# Altium PCB P2_Buttons.PcbDoc
Units mil, origin at the board's own origin, x right, y up, seen from the top; angles counter-clockwise.
Board outline 775 x 600 mil, 2 copper layers (Top Layer, Bottom Layer); 9 components, 9 nets, 29 pads, 4 vias.
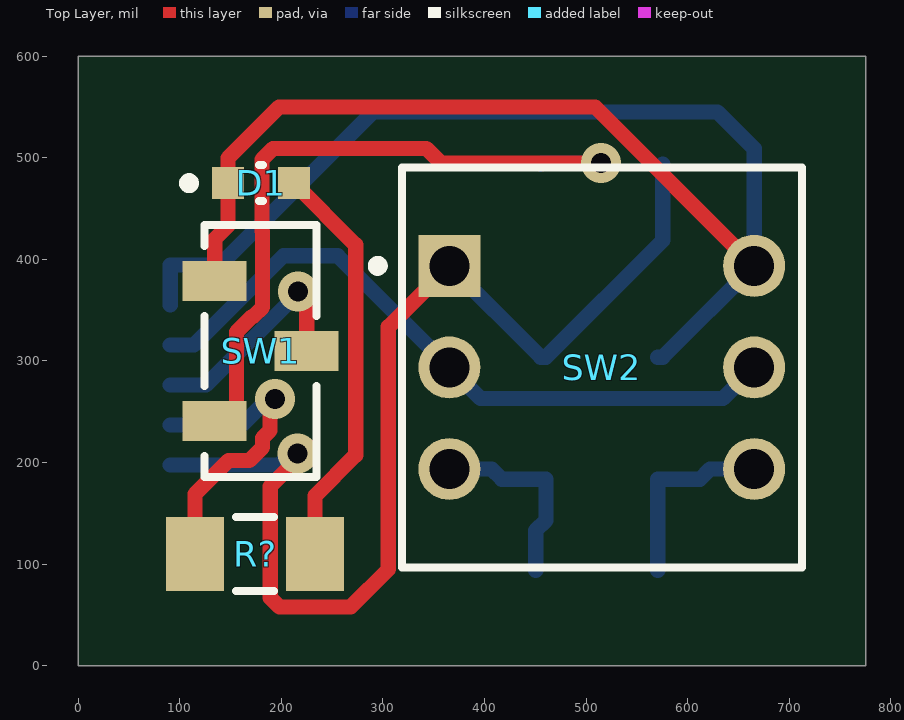
[diagram p0: Top Layer view]
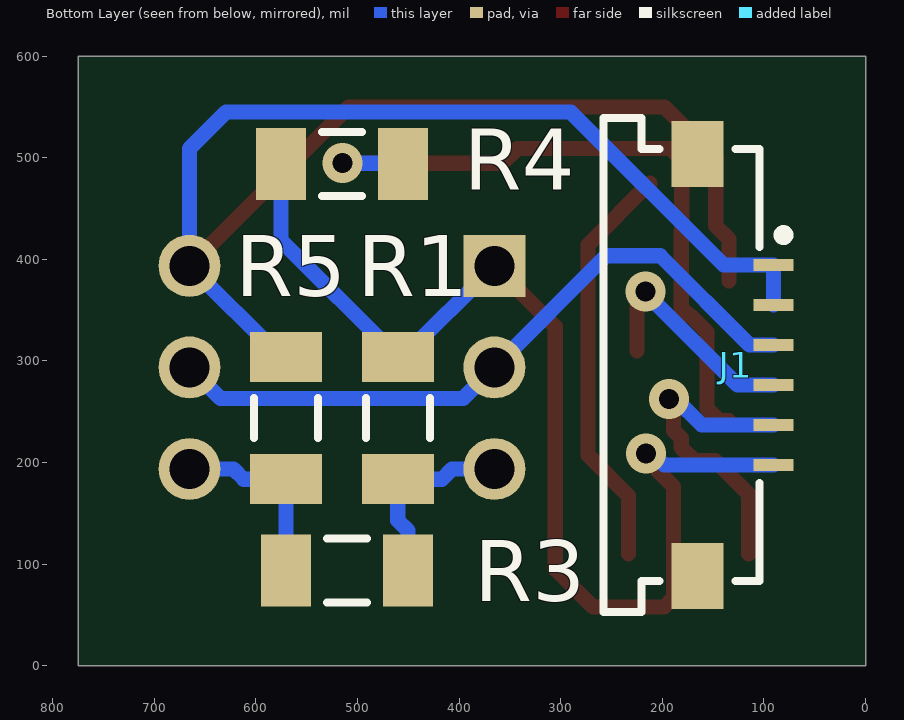
[diagram p1: Bottom Layer view, seen from below]
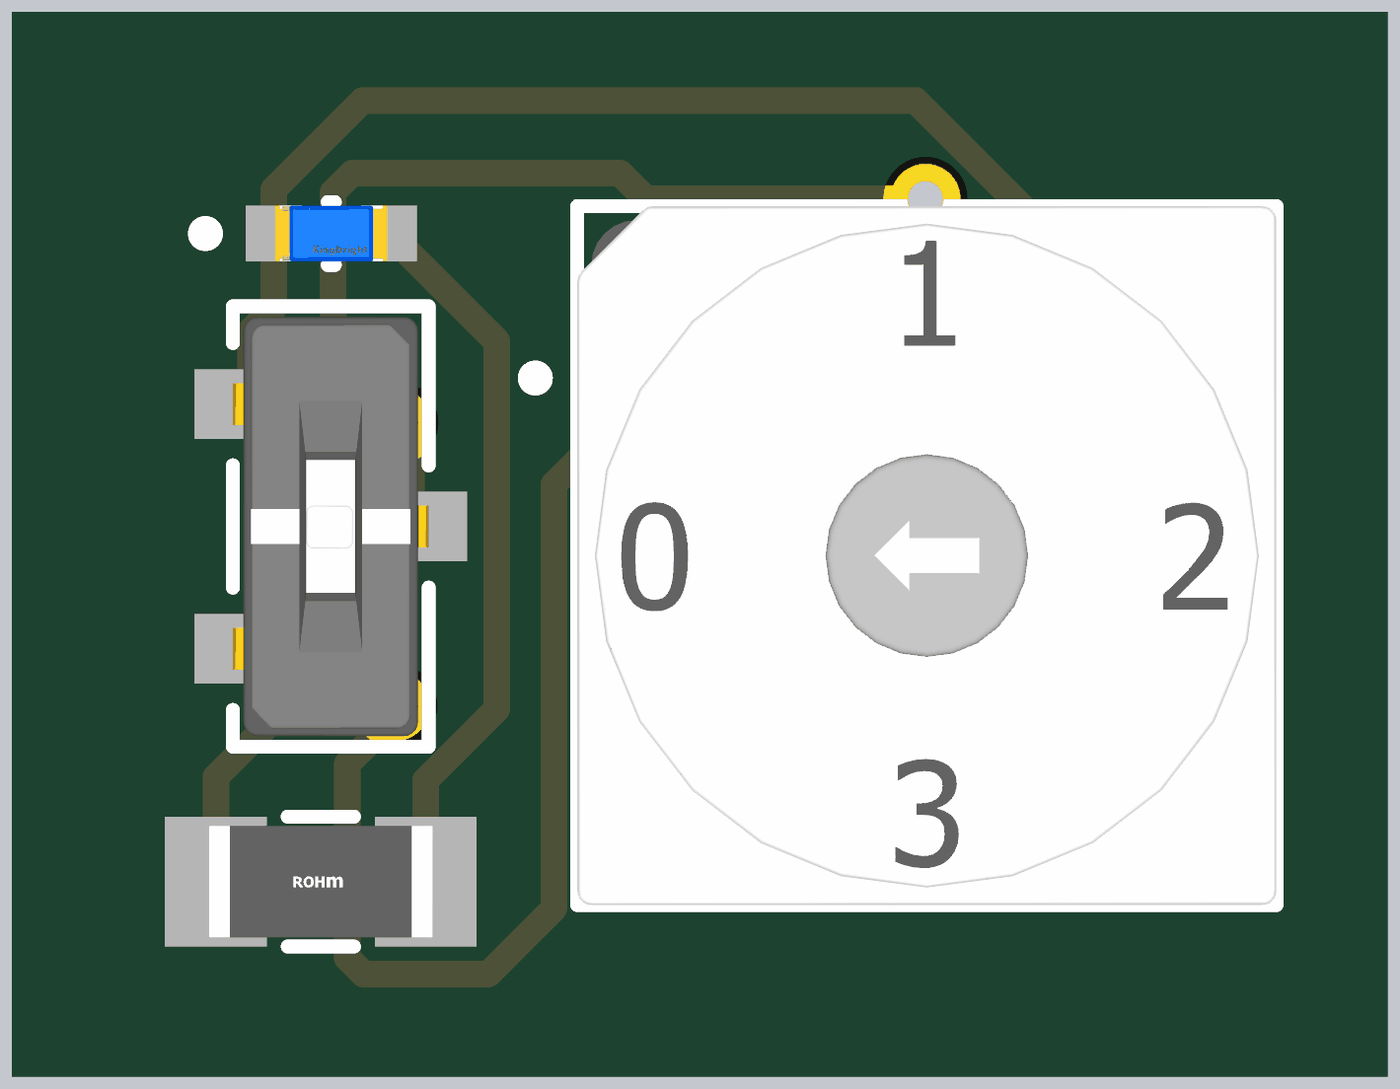
[diagram p2: 3D render of the assembled board from above, using the file's embedded part models]

## Layer stack, top to bottom
Top Solder: solder mask 0.4, Solder Resist, Dk 3.5
Top Layer: signal copper 1.4
Dielectric 1: dielectric 12.6, FR-4, Dk 4.8
Bottom Layer: signal copper 1.4
Bottom Solder: solder mask 0.4, Solder Resist, Dk 3.5

## Board outline
0,0 775,0 775,600 0,600

## Design rules (kind name [scope] priority, off if disabled: settings)
BoardOutlineClearance [All] p1: gap=7.87 ignorepadtopadclearanceinfootprint=FALSE except(15.75: Arc-SplitBarrior Arc-SplitContinuation Track-SplitBarrior Track-SplitContinuation SMDPad-SplitBarrior SMDPad-SplitContinuation THPad-SplitBarrior THPad-SplitContinuation Via-SplitBarrior Via-SplitContinuation Fill-SplitBarrior Fill-SplitContinuation Poly-SplitBarrior Poly-SplitContinuation Region-SplitBarrior Region-SplitContinuation Text-SplitBarrior Text-SplitContinuation)
Clearance "Clearance Bottom Layer" [OnLayer('Bottom Layer')] p1: gap=8 ignorepadtopadclearanceinfootprint=TRUE except(10: Arc-Text Track-Text SMDPad-Text THPad-Text Via-Text Fill-Text Poly-Text Region-Text Text-Text)
Clearance "Clearance Top Layer" [OnLayer('Top Layer')] p2: gap=8 ignorepadtopadclearanceinfootprint=TRUE except(10: Arc-Text Track-Text SMDPad-Text THPad-Text Via-Text Fill-Text Poly-Text Region-Text Text-Text)
Clearance [All] p3: gap=7.87 ignorepadtopadclearanceinfootprint=FALSE except(3.5: Arc-Arc Arc-Track Arc-SMDPad Track-Track Track-SMDPad SMDPad-SMDPad; 5: Arc-Via Track-Via SMDPad-Via THPad-Via Via-Via; 10: Arc-Text Track-Text SMDPad-Text THPad-Text Via-Text Fill-Text Poly-Text Region-Text Text-Text)
HoleSize [All] p1: absolutevalues=TRUE maxlimit=248.03 minlimit=7.87 maxpercent=80.000 minpercent=20.000
MinimumAnnularRing [All] p1: minimumring=3
MinimumSolderMaskSliver [All] p1: minsoldermaskwidth=3.94
PolygonConnect PolygonConnect_1 [All] p1: thpad.connectstyle=Relief thpad.reliefconductorwidth=20 thpad.reliefentries=4 thpad.polygonreliefangle="90 Angle" thpad.airgapwidth=10 smdpad.connectstyle=Relief smdpad.reliefconductorwidth=20 smdpad.reliefentries=4 smdpad.polygonreliefangle="90 Angle" smdpad.airgapwidth=10 via.connectstyle=Direct via.reliefconductorwidth=20 via.reliefentries=4 via.polygonreliefangle="90 Angle" via.airgapwidth=10
RoutingCorners [All] p1: cornerstyle=Round minsetback=100 maxsetback=100
RoutingVias [All] p1: holewidth=19.68 width=39.37 viastyle="Through Hole" minholewidth=7.87 minwidth=17.72 maxholewidth=39.37 maxwidth=78.74
SilkToSilkClearance [All] p1: silktosilkclearance=3.94
SilkToSolderMaskClearance [IsPad] p1: minsilkscreentomaskgap=3.94 clearancetoexposedcopper=TRUE
SolderMaskExpansion [All] p1: expansion=4 istentingtop=FALSE
Width [All] p1: maxlimit=100 minlimit=3.5 preferedwidth=15
25 further rules are at their usual default settings.

## Components (designator, comment, footprint, x,y, rotation, side; value= is the part's Value field where it differs from the comment)
D1 "On Indicator" FP-APT1608QBC-D-MFG 180,475 r0 top
J1 "" 686106183422 181.13,295.94 r270 bottom
R1 "10k" RESC3116X65X40ML10T20 460.38,243.62 r90 bottom
R3 "10k" RESC3116X65X40ML10T20 510.38,93.62 r180 bottom
R4 "10k" RESC3116X65X40ML10T20 515.38,493.62 r0 bottom
R5 "10k" RESC3116X65X40ML10T20 570.38,243.62 r270 bottom
R? "KTR18EZPJ102" FP-KTR18-IPC_A 174.1,110 r0 top
SW1 "" FP-CJS-1201TA-MFG 179.72,310 r270 top
SW2 "Character Select" FP-PT65121-MFG 515.38,293.62 r0 top

## Footprints (in the part's own frame and the unit in brackets; to place one, negate y for a bottom-side part, rotate by r counter-clockwise, add the part's x,y. Pads: shape width x height; smd on the part's side, far side on the other; paste and mask are expansions set on the pad)
686106183422 [mm] "ZIF Connectors, Horizontal, Top Contact Low Profile, pitch 1mm, 6p"
  rect 0.3x1 smd: 1(-2.5,2.3) 2(-1.5,2.3) 3(-0.5,2.3) 4(0.5,2.3) 5(1.5,2.3) 6(2.5,2.3)
  rect 1.65x1.3 smd: M1(-5.275,0.4) M2(5.275,0.4)
  silkscreen extent -6.18,-1.95 6.18,2.67, body extent -6.1,-1.9 6.1,2.35, height 1.28
FP-APT1608QBC-D-MFG [mm]
  rect 0.8x0.8 smd paste+0 mask+0: 1(-0.825,0) 2(0.825,0)
  silkscreen extent -1.92,-0.45 0.05,0.45, body extent -1.33,-0.55 1.33,0.55, height 0.25
FP-CJS-1201TA-MFG [mm]
  rect 1x1.6 smd paste+0 mask+0: 1(-1.75,-1.15) 2(0,1.15) 3(1.75,-1.15)
  silkscreen extent -3.15,-1.4 3.15,1.4, body extent -3.25,-2.05 3.25,2.05, height 0.25
FP-KTR18-IPC_A [mil]
  rect 57.31x73.16 smd paste+0 mask+0: 1(-59.1,0) 2(59.1,0)
  silkscreen extent -19,-37 19,37, body extent -107,-56 107,56, height 10
FP-PT65121-MFG [mm]
  rect 1.55x1.55 hole 1 paste-2539.97 mask+0: 1(-3.81,2.54)
  round 1.55 hole 1 paste-2539.97 mask+0: 2(-3.81,-2.54) 4(3.81,-2.54) 8(3.81,2.54) C(-3.81,0) C(3.81,0)
  silkscreen extent -5.72,-5 5,5, body extent -5.1,-5.1 5.1,5.1, height 0.25
RESC3116X65X40ML10T20 [mm] "Chip Resistor, 2-Leads, Body 3.10x1.60mm, IPC Low Density"
  rect 1.25x1.8 smd: 1(-1.525,0) 2(1.525,0)
  silkscreen extent -0.5,-0.8 0.5,0.8, body extent -1.6,-0.85 1.6,0.85, height 0.65

## Part data
D1: library part CMP-2000-05788-2, "APT1608QBC/D / LED BLUE CLEAR CHIP SMD", Case Code (Imperial)=0603, Case Code (Metric)=1608, Color=Blue, Forward Current=20mA, Forward Voltage=3.3V, Lens Color=Colorless, Max Operating Temperature=85°C, Min Operating Temperature=-40°C, Package Quantity=2000, Case/Package=0603, Dominant Wavelength=465nm, Height=0.75mm, Illumination Color=Blue, Lead Free="Lead Free", Length=1.6mm, Lens Style=Flat, Lens Transparency=Clear, Luminous Intensity=100mcd, Mount="Surface Mount", Number of LEDs=1, Number of Pins=2, Packaging="Tape and Reel", Test Current=20mA, Viewing Angle=120°, Width=0.8mm
J1: library part CMP-1502-01493-2, "686106183422", Contact Resistance=30mΩ, Current Rating=800mA, Insulation Resistance=100MΩ, Max Operating Temperature=85°C, Min Operating Temperature=-25°C, Operating Supply Voltage=50V, Contact Plating=Tin, Gender=Receptacle, Lead Pitch=1mm, Length=7.1mm, NexarPartId=81848301, Number of Pins=6, Orientation=Horizontal, Packaging="Tape and Reel", Pitch=1mm, RoHS=Compliant
R1 R3: library part CMP-2003-04020-1, Manufacturer=Yageo, Part Number=RC1206JR-1310KL
R4 R5: library part CMP-2003-04020-1, "RC1206JR-1310KL", Manufacturer=Yageo, Part Number=RC1206JR-1310KL
R?: library part CMP-08839-031408-1, "Res Thick Film 1206 1kΩ 5% 0.1W ±200ppm/°C Automotive Paper T/R", Case Code (Imperial)=1206, Case Code (Metric)=3216, Max Operating Temperature=155°C, Max Power Dissipation=250mW, Min Operating Temperature=-55°C, Package Quantity=1, Resistance=1kR, Resistor Type="Thick Film", Temperature Coefficient=200ppm/°C, Tolerance=5%, Case/Package=1206, Features="Automotive AEC-Q200", Height=0.026inch, Lead Free="Lead Free", Length=0.126inch, Mount="Surface Mount", Number of Terminations=2, Packaging="Tape and Reel", Power Rating=250mW, RoHS Compliant=Yes, Series=KTR, Size Code=1206, Width=0.063inch
SW1: library part CMP-71745-000001-1, "CJS-1201TA / SWITCH SLIDE SPDT 100MA 6V", Contact Current Rating=100mA, Contact Resistance=100mΩ, Manufacturer="Copal Electronics Inc", Manufacturer Part Number=CJS-1201TA, Operating Force=5.9N, Temperature="-40°C to +85°C", Temperature Range High=+85°C, Temperature Range Low=-40°C, Voltage Rating Dc=6V, Automotive=No, Category=Switch, ComponentLink2Description=Datasheet, ComponentLink2URL=https://www.nidec-copal-electronics.com/e/catalog/switch/cjs.pdf, Device Class L1=Electromechanical, Device Class L2=Switches, Device Class L3="Slide Switches", Digikey Description="SWITCH SLIDE SPDT 100MA 6V", Height=2.5mm, Lead Free=Yes, Mount="Surface Mount", Octopart=https://octopart.com/cjs-1201ta-nidec+copal-87363567, Package=CJS-1201TA, RoHS=TRUE, Standoff Height=0mm, Throw Configuration=SPDT
SW2: library part CMP-47017-000003-1, "PT65121 / SWITCH ROTARY DIP SP4T 150MA 24V", Contact Current Rating=150mA, Current Rating=400mA, Flammability Rating="UL94 V-0", Insulation Resistance=100MR, Max Operating Temperature=70°C, Max Voltage Rating (DC)=24V, Min Operating Temperature=-20°C, Package Quantity=50, Actuator Material=Polyoxymethylene, Actuator Type=Rotary, Body Material=Thermoplastic, Contact Material=Bronze, Contact Plating=Gold, Depth=10mm, Length=10mm, Max Current Rating=150mA, Mechanical Life=10000Cycles, Mount="Through Hole", Number of Positions=4, Orientation=Straight, Packaging=Rail/Tube, Radiation Hardening=No, REACH SVHC="No SVHC", RoHS Compliant=Yes, Series=PT65, Switching Current=400mA, Switching Voltage=24V, Terminal Pitch=2.54mm, Termination="PC Pin", Throw Configuration=SP4T, Voltage Rating (DC)=24V, Washable=Yes

## Via types
v1: diameter 39.37, hole 19.68, Top Layer to Bottom Layer, 4 vias

## Nets (pads, with @x,y where several pads share a name; then routed paths per layer and width w, separated by ;. In a path a pad name is that pad's centre, name@x,y a point inside that pad or via, vN(x,y) a via of type N, cw(c..) or ccw(c..) an arc to the next point about the centre after c; other vN are vias at no path point)
Character_Select_P2: J1.3 SW2.C | length 682.1
  Bottom Layer w15: J1.3 114.13,315.63 202.06,403.56 255.44,403.56 365.38,293.62 396,263 634.76,263 SW2.C@665.38,293.62
GND_P2: D1.1 J1.1 J1.2 R5.1 SW1.1 SW2.8 | length 1668.8
  Top Layer w15: SW1.1 134.45,420 147.52,433.07 D1.1 147.52,499.76 197.76,550 509,550 SW2.8
  Bottom Layer w15: J1.2 J1.1 139.56,394.37 290.19,545 629.38,545 665.38,509 SW2.8 575.42,303.66 R5.1
NetD1_2: D1.2 R?.2 | length 406.7
  Top Layer w15: D1.2 273.19,414.29 273.19,207.22 233.21,167.24 R?.2
NetR1_1: R1.1 R3.2 SW2.2 | length 193.3
  Bottom Layer w15: SW2.2 407,193.62 417.04,183.58 R1.1 460.38,143.04 450.34,133 R3.2
NetR3_1: R3.1 R5.2 SW2.4 | length 189.1
  Bottom Layer w15: R3.1 570.42,138 570.38,138.04 R5.2 612,183.58 622.04,193.62 SW2.4
NetR4_1: R4.1 SW1.3 | length 686.7
  Top Layer w15: SW1.3 143.73,241.1 155.92,253.29 155.92,328.47 171.15,343.71 172.36,343.71 181.44,352.79 181.44,427.56 181,428 181,498.25 191.75,509 342.7,509 357.08,494.62 v1(514.62,494.62)
  Bottom Layer w15: R4.1 456.34,494.62 v1(514.62,494.62)
On_Light: J1.5 R?.1 | length 310.9
  Top Layer w15: R?.1 115,169.08 148,202.08 168.52,202.08 181.44,215 181.44,224.03 188.9,231.49 188.9,257.97 v1(193.57,262.63)
  Bottom Layer w15: J1.5 161.23,236.89 186.97,262.63 v1(193.57,262.63)
RESET_P2: J1.4 SW1.2 | length 226.9
  Top Layer w15: v1(216.63,368.37) 216.63,361.78 225,353.41 SW1.2
  Bottom Layer w15: J1.4 125.92,276.26 216.63,366.97 v1(216.63,368.37)
VCC_P2: J1.6 R1.2 R4.2 SW2.1 | length 1112.2
  Top Layer w15: v1(216.1,208.93) 216.1,203.38 189.05,176.32 189.05,67 198.13,57.92 268.28,57.92 305.33,94.96 305.33,333.57 SW2.1
  Bottom Layer w15: J1.6 198.1,197.52 209.51,208.93 v1(216.1,208.93) ; SW2.1 455.34,303.66 R1.2 575.42,418.7 R4.2
pads on no net: J1.M1 J1.M2